# EAGLE board HWTestRig (EAGLE 7.4.0)
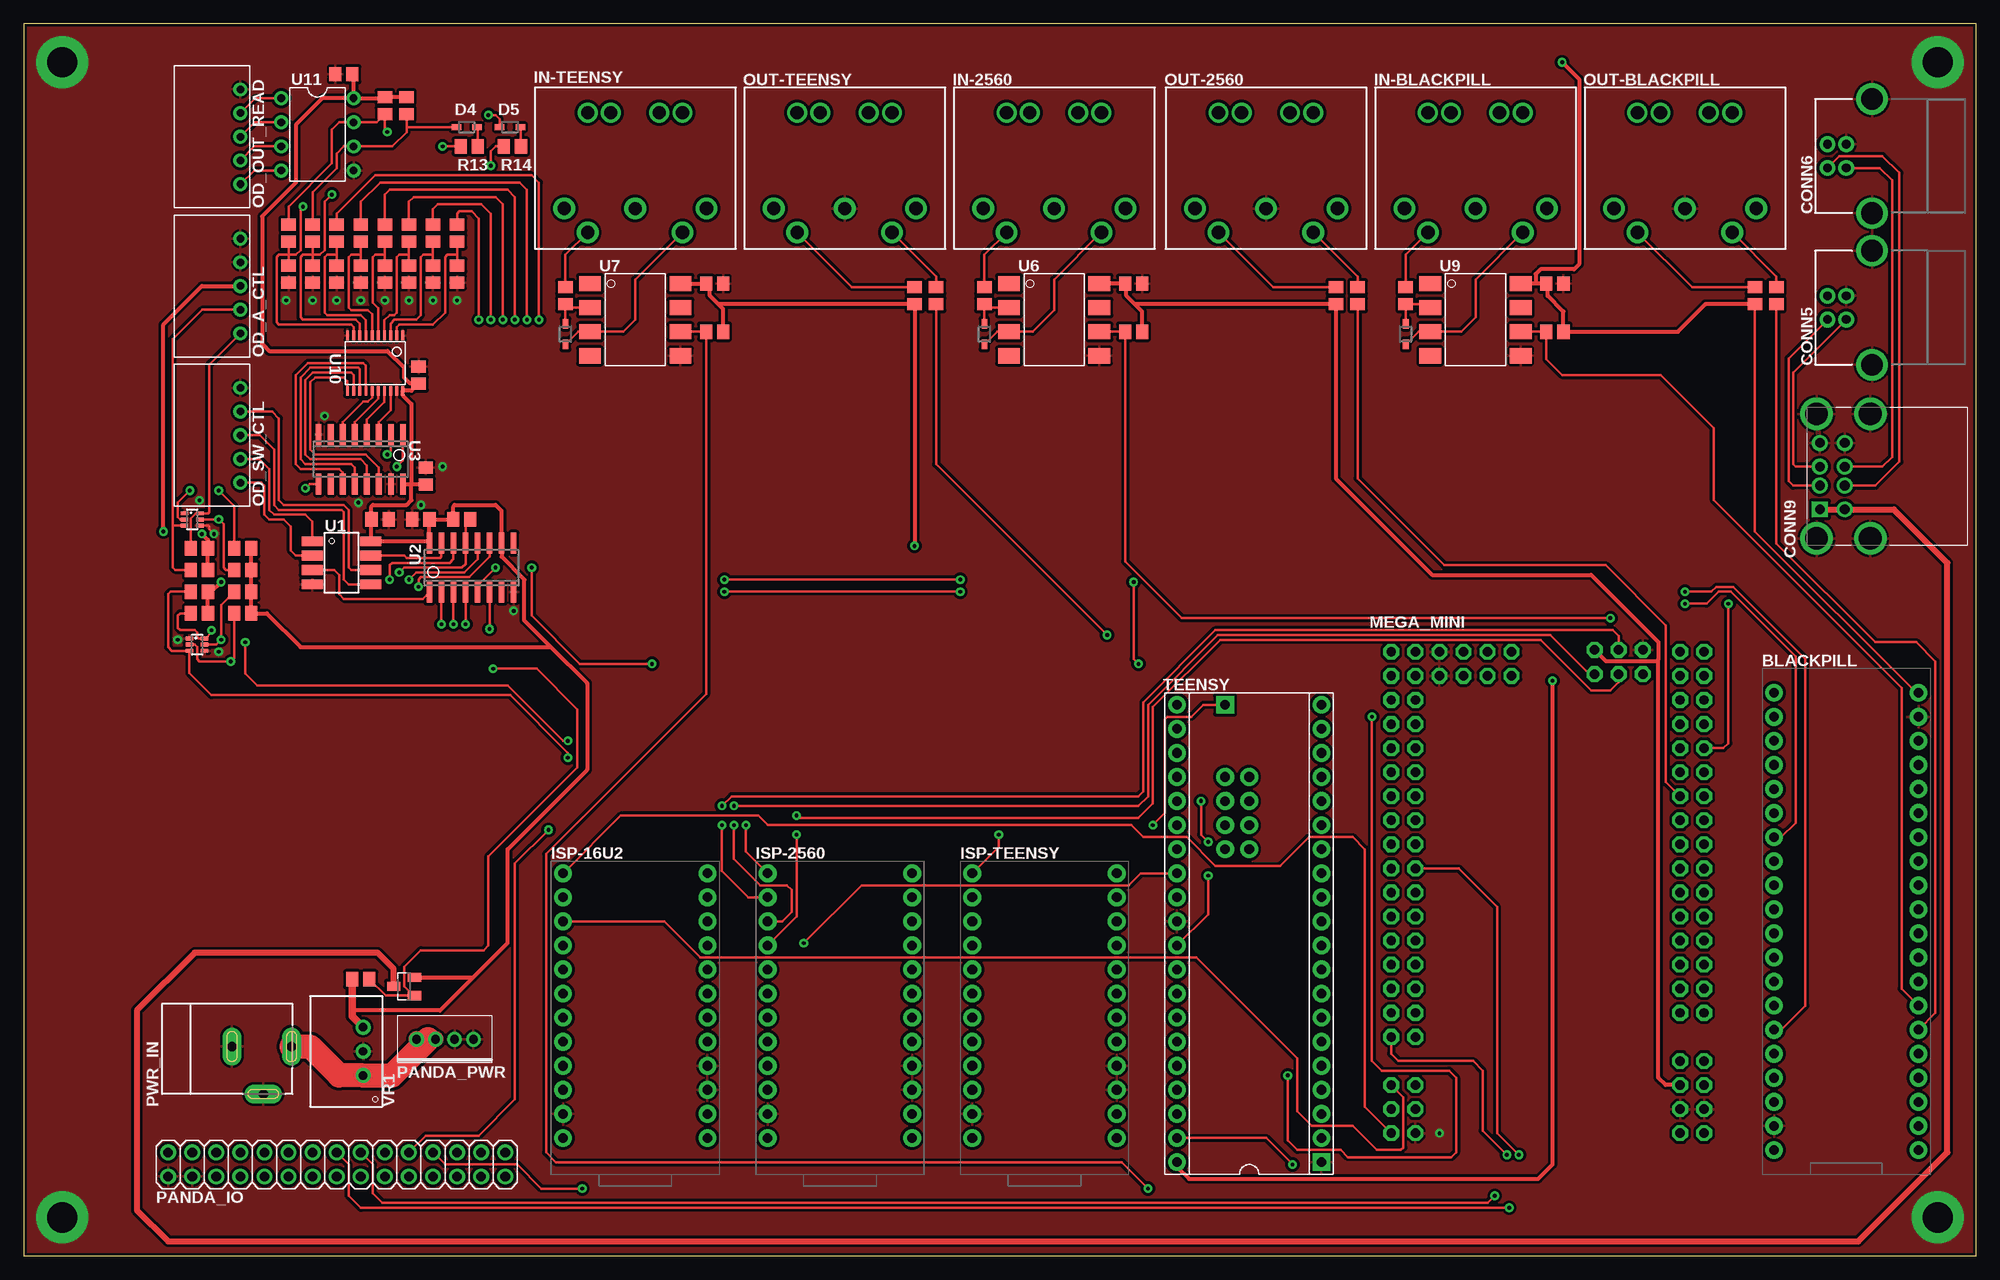
[diagram p0: board, top side]
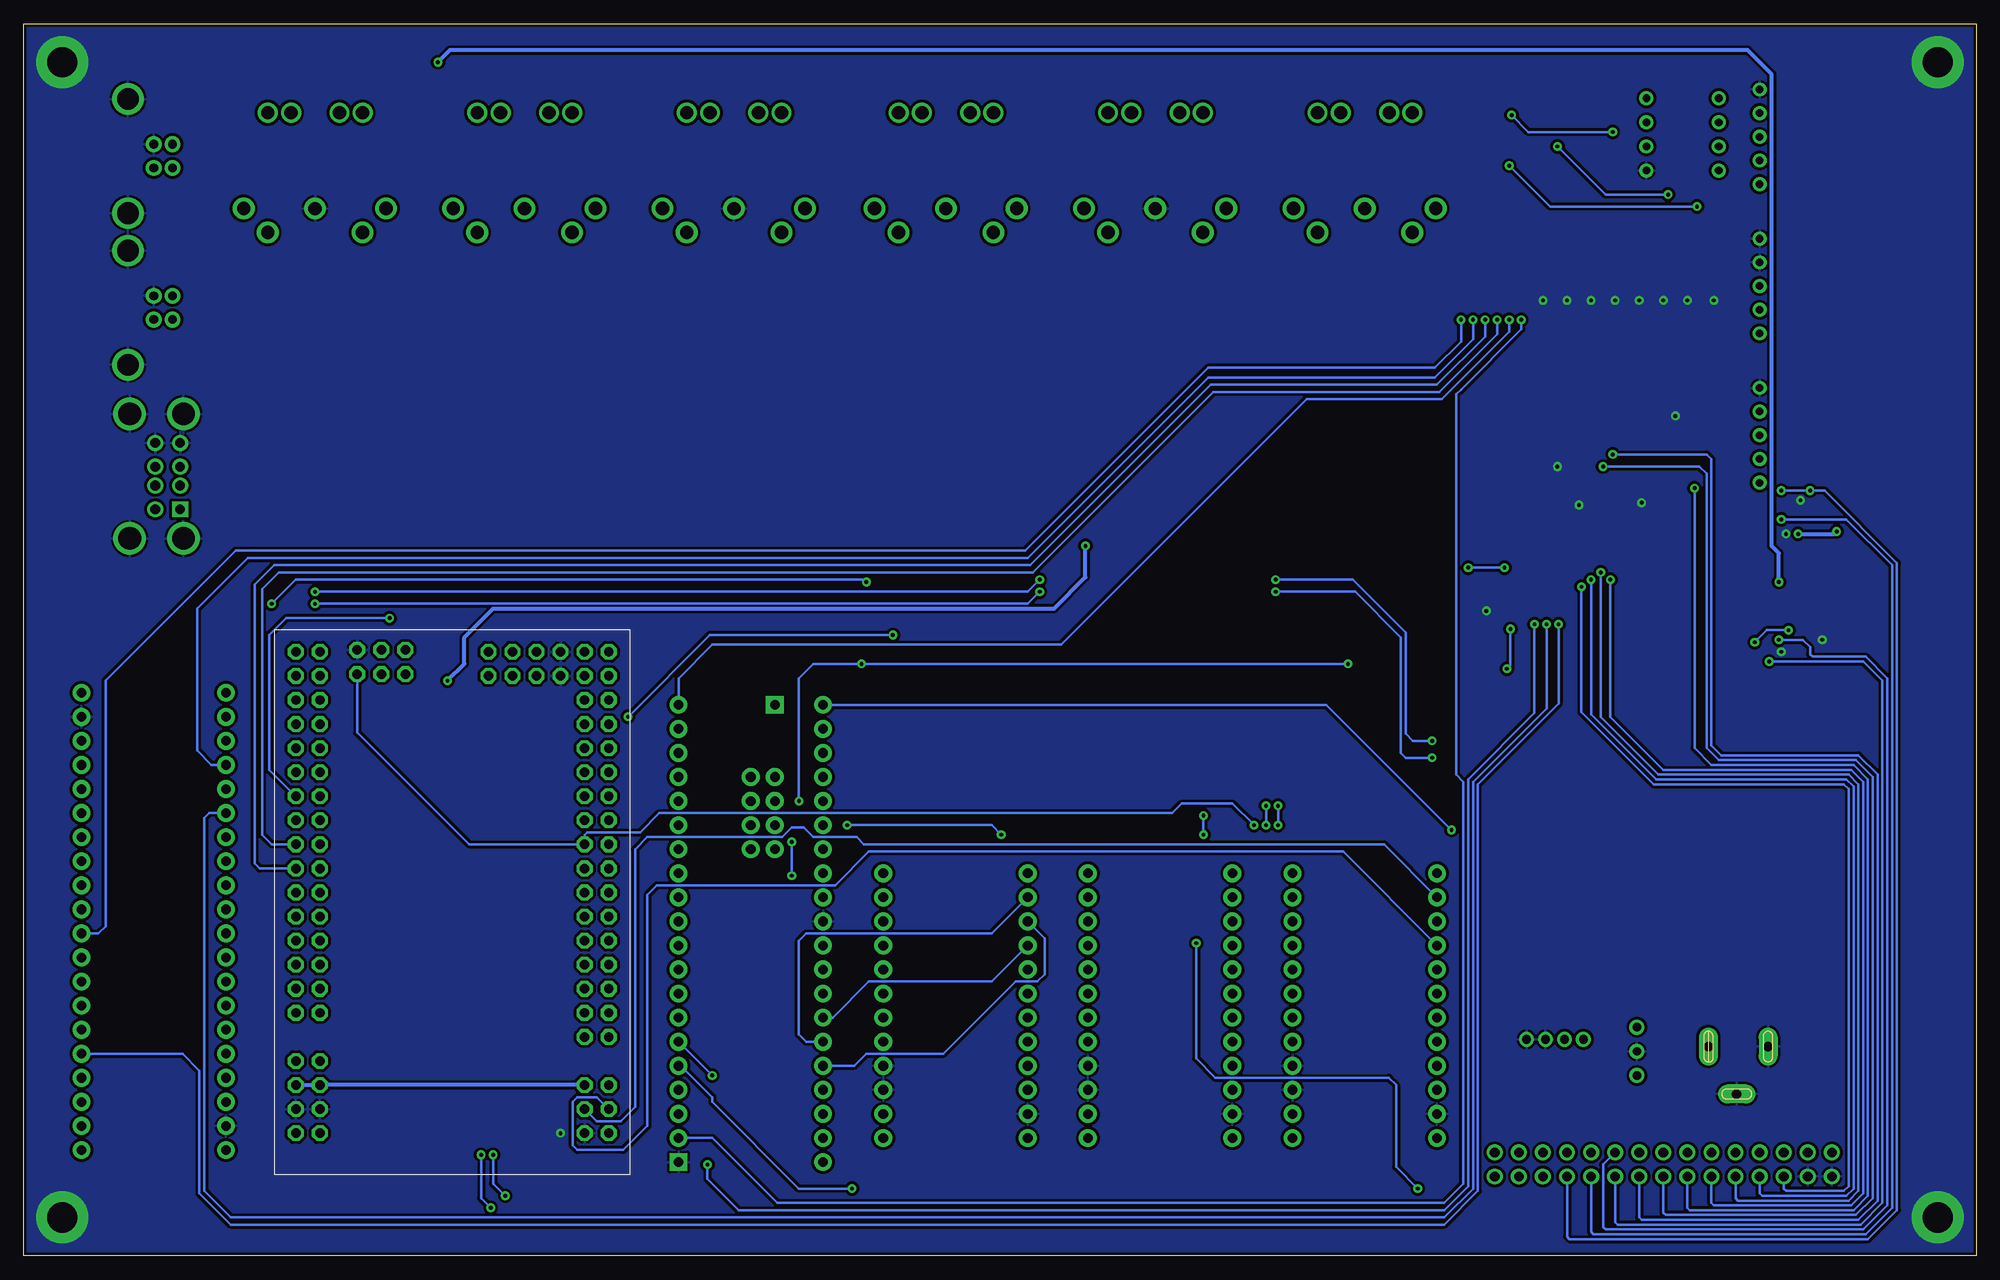
[diagram p1: board, bottom side, seen from below]

Size 205.99 x 130.05 mm. Coordinates in mm from the lower left corner, seen from the top.
Outline: 0,0 205.99,0 205.99,130.05 0,130.05 0,0
Copper layers (1*16): Top 0.035mm / dielectric 1.5mm / Bottom 0.035mm
Design rules "smiery *": minimum track width 8mil, minimum drill 12mil, track to track 7mil, track to pad 5mil, pad to pad 5mil, via to via 6mil, smd to smd 0mil, copper to edge 12mil, drill to drill 10mil, minimum pad ring 13mil, minimum via ring 10mil, stop-mask expansion 2mil, vias tented up to drill 25mil, thermal gap 10mil
Net classes: 1 vcc: width 0.254 mm

## Footprints (pad centres in the part's own frame; a part is rotated, then mirrored left to right if it is on the bottom)
STM32F411-BLACK_PILL = drill 1.016 pad 1.88: P1.1 -7.62,24.13; P1.2 -7.62,21.59; P1.3 -7.62,19.05; P1.4 -7.62,16.51; P1.5 -7.62,13.97; P1.6 -7.62,11.43; P1.7 -7.62,8.89; P1.8 -7.62,6.35; P1.9 -7.62,3.81; P1.10 -7.62,1.27; P1.11 -7.62,-1.27; P1.12 -7.62,-3.81; P1.13 -7.62,-6.35; P1.14 -7.62,-8.89; P1.15 -7.62,-11.43; P1.16 -7.62,-13.97; P1.17 -7.62,-16.51; P1.18 -7.62,-19.05; P1.19 -7.62,-21.59; P1.20 -7.62,-24.13; P2.1 7.62,24.13; P2.2 7.62,21.59; P2.3 7.62,19.05; P2.4 7.62,16.51; P2.5 7.62,13.97; P2.6 7.62,11.43; P2.7 7.62,8.89; P2.8 7.62,6.35; P2.9 7.62,3.81; P2.10 7.62,1.27; P2.11 7.62,-1.27; P2.12 7.62,-3.81; P2.13 7.62,-6.35; P2.14 7.62,-8.89; P2.15 7.62,-11.43; P2.16 7.62,-13.97; P2.17 7.62,-16.51; P2.18 7.62,-19.05; P2.19 7.62,-21.59; P2.20 7.62,-24.13
C0805 = smd 1.27 x 1.524: 1 -0.9,0; 2 0.9,0
USB-B-PTH = drill 0.914 pad 1.676: D+ 1.25,-4.572; D- 1.25,-6.553; GND -1.25,-4.572; VBUS -1.25,-6.553 | drill 2.286: S1 -6.02,-1.854; S2 6.02,-1.854
SS-52100-003 = drill 1.02: D+1 1,7.87; D+2 1,5.25; D-1 -1,7.87; D-2 -1,5.25; GND1 3.5,7.87; GND2 3.5,5.25; VBUS2 -3.5,5.25 | drill 2.4: S1 -6.57,8.22; S2 6.57,8.22; S3 -6.57,2.54; S4 6.57,2.54 | drill 1.02 square: VBUS1 -3.5,7.87
SOD-323 = smd 1 x 0.6: A 1.1,0; C -1.1,0
DIN5 = drill 1.4 pad 2.286: 1 -7.483,-4.768; 2 -0.003,-4.778; 3 7.527,-4.768; 4 -5.013,-7.298; 5 4.987,-7.288 | drill 1.4 pad 2: 6 4.987,5.341; 7 -5.02,5.341; 8 -2.582,5.341; 9 2.523,5.341
ARDUINO-PRO_MICRO = drill 1.016 pad 1.88: 1 -7.62,13.97; 2 -7.62,11.43; 3 -7.62,8.89; 4 -7.62,6.35; 5 -7.62,3.81; 6 -7.62,1.27; 7 -7.62,-1.27; 8 -7.62,-3.81; 9 -7.62,-6.35; 10 -7.62,-8.89; 11 -7.62,-11.43; 12 -7.62,-13.97; 13 7.62,-13.97; 14 7.62,-11.43; 15 7.62,-8.89; 16 7.62,-6.35; 17 7.62,-3.81; 18 7.62,-1.27; 19 7.62,1.27; 20 7.62,3.81; 21 7.62,6.35; 22 7.62,8.89; 23 7.62,11.43; 24 7.62,13.97
ARDUINO-MEGA2560-MEDUINO = drill 1 octagon: 2 -7.62,-13.97; 3 -7.62,-16.51; 4 -5.08,-13.97; 5 -5.08,-16.51; 6 -2.54,-13.97; 7 -2.54,-16.51; 8 0,-13.97; 9 0,-16.51; 10 2.54,-13.97; 11 2.54,-16.51; 12 5.08,-13.97; 13 5.08,-16.51; 14 7.62,-13.97; 15 7.62,-16.51; 16 10.16,-13.97; 17 10.16,-16.51; 18 12.7,-13.97; 19 12.7,-16.51; 20 15.24,-13.97; 21 15.24,-16.51; 22 17.78,-13.97; 23 17.78,-16.51; 24 20.32,-13.97; 25 20.32,-16.51; 26 22.86,-13.97; 27 22.86,-16.51; 28 25.4,-13.97; 29 25.4,-16.51; 30 27.94,-13.97; 31 27.94,-16.51; 32 10.16,16.51; 33 10.16,13.97; 34 12.7,16.51; 35 12.7,13.97; 36 15.24,16.51; 37 15.24,13.97; 38 17.78,16.51; 39 17.78,13.97; 40 20.32,16.51; 41 20.32,13.97; 42 22.86,16.51; 43 22.86,13.97; 44 25.4,16.51; 45 25.4,13.97; 46 27.94,16.51; 47 27.94,13.97; 48 27.94,8.89; 49 25.4,8.89; 50 27.94,6.35; 51 25.4,6.35; 52 27.94,3.81; 53 25.4,3.81; +3V3 -15.24,-13.97; +3V31 -15.24,-16.51; +5V -17.78,-13.97; +5V1 -17.78,-16.51; +5V2 -17.78,13.97; +5V3 28.14,-4.95; A0 -12.7,16.51; A1 -12.7,13.97; A2 -10.16,16.51; A3 -10.16,13.97; A4 -7.62,16.51; A5 -7.62,13.97; A6 -5.08,16.51; A7 -5.08,13.97; A8 -2.54,16.51; A9 -2.54,13.97; A10 0,16.51; A11 0,13.97; A12 2.54,16.51; A13 2.54,13.97; A14 5.08,16.51; A15 5.08,13.97; AREF 7.62,16.51; GND -20.32,-13.97; GND1 -20.32,-16.51; GND2 25.4,11.43; GND3 27.94,11.43; GND4 -22.86,13.97; GND5 28.14,-10.03; MISO_16U2 -17.78,16.51; MISO_2560 25.6,-4.95; MOSI_16U2 -20.32,13.97; MOSI_2560 28.14,-7.49; RESET 7.62,13.97; RESET@1 25.6,-10.03; RST_16U2 -22.86,16.51; RX0 -10.16,-13.97; SCK_16U2 -20.32,16.51; SCK_2560 25.6,-7.49; TX0 -10.16,-16.51; VIN -22.86,-13.97; VIN1 -22.86,-16.51
JST-XH-05P-H = drill 0.8: 1 -5,0; 2 -2.5,0; 3 0,0; 4 2.5,0; 5 5,0
2X15-2.54 = drill 1.016: 1 -17.78,-1.27; 2 -17.78,1.27; 3 -15.24,-1.27; 4 -15.24,1.27; 5 -12.7,-1.27; 6 -12.7,1.27; 7 -10.16,-1.27; 8 -10.16,1.27; 9 -7.62,-1.27; 10 -7.62,1.27; 11 -5.08,-1.27; 12 -5.08,1.27; 13 -2.54,-1.27; 14 -2.54,1.27; 15 0,-1.27; 16 0,1.27; 17 2.54,-1.27; 18 2.54,1.27; 19 5.08,-1.27; 20 5.08,1.27; 21 7.62,-1.27; 22 7.62,1.27; 23 10.16,-1.27; 24 10.16,1.27; 25 12.7,-1.27; 26 12.7,1.27; 27 15.24,-1.27; 28 15.24,1.27; 29 17.78,-1.27; 30 17.78,1.27
SMW200-04P = drill 0.9 pad 1.27: 1 -2.999,-0.001; 2 -0.999,-0.001; 3 1.001,-0.001; 4 3.001,-0.001
BARREL_JACK = drill 1 pad 2 long: GND@1 0,0.13; GND@2 5,3.43; PWR1 0,6.43
SOT23 = smd 1.4 x 1: 1 -1.1,0.95; 2 -1.1,-0.95; 3 1.1,0
SOT-363 = smd 0.4 x 0.8: 1 -0.65,-0.8; 2 0,-0.8; 3 0.65,-0.8; 4 0.65,0.8; 5 0,0.8; 6 -0.65,0.8
R0805 = smd 1.27 x 1.524: 1 -0.9,0; 2 0.9,0
TEENSY-2.0++ = drill 1.016 pad 1.88: AREF 3.81,7.62; GND1 1.27,7.62; PA0 8.89,2.54; PA1 11.43,2.54; PA2 13.97,2.54; PA3 16.51,2.54; PA4 8.89,0; PA5 11.43,0; PA6 13.97,0; PA7 16.51,0; PB0 -6.35,7.62; PB1 -8.89,7.62; PB2 -11.43,7.62; PB3 -13.97,7.62; PB4 -16.51,7.62; PB5 -19.05,7.62; PB6 -21.59,7.62; PB7 -21.59,-7.62; PC0 6.35,-7.62; PC1 8.89,-7.62; PC2 11.43,-7.62; PC3 13.97,-7.62; PC4 16.51,-7.62; PC5 19.05,-7.62; PC6 21.59,-7.62; PC7 24.13,-7.62; PD0 -19.05,-7.62; PD1 -16.51,-7.62; PD2 -13.97,-7.62; PD3 -11.43,-7.62; PD4 -8.89,-7.62; PD5 -6.35,-7.62; PD6 -3.81,-7.62; PD7 -1.27,-7.62; PE0 1.27,-7.62; PE1 3.81,-7.62; PE6 -1.27,7.62; PE7 -3.81,7.62; PF0 6.35,7.62; PF1 8.89,7.62; PF2 11.43,7.62; PF3 13.97,7.62; PF4 16.51,7.62; PF5 19.05,7.62; PF6 21.59,7.62; PF7 24.13,7.62; VCC -24.13,7.62 | drill 1.016 pad 1.88 square: GND -24.13,-7.62; RST 24.13,2.54
SM8 = smd 1.016 x 2.235: 1 -2.286,-3.099; 2 -0.762,-3.099; 3 0.762,-3.099; 4 2.286,-3.099; 5 2.286,3.099; 6 0.762,3.099; 7 -0.762,3.099; 8 -2.286,3.099
SO16 = smd 2.2 x 0.6: 1 -2.6,4.445; 2 -2.6,3.175; 3 -2.6,1.905; 4 -2.6,0.635; 5 -2.6,-0.635; 6 -2.6,-1.905; 7 -2.6,-3.175; 8 -2.6,-4.445; 9 2.6,-4.445; 10 2.6,-3.175; 11 2.6,-1.905; 12 2.6,-0.635; 13 2.6,0.635; 14 2.6,1.905; 15 2.6,3.175; 16 2.6,4.445
SMD-8 = smd 2.3 x 1.6: 1 -4.77,3.81; 2 -4.77,1.27; 3 -4.77,-1.27; 4 -4.77,-3.81; 5 4.77,-3.81; 6 4.77,-1.27; 7 4.77,1.27; 8 4.77,3.81
TSSOP20 = smd 0.991 x 0.305: 1 -2.918,2.925; 2 -2.918,2.275; 3 -2.918,1.625; 4 -2.918,0.975; 5 -2.918,0.325; 6 -2.918,-0.325; 7 -2.918,-0.975; 8 -2.918,-1.625; 9 -2.918,-2.275; 10 -2.918,-2.925; 11 2.918,-2.925; 12 2.918,-2.275; 13 2.918,-1.625; 14 2.918,-0.975; 15 2.918,-0.325; 16 2.918,0.325; 17 2.918,0.975; 18 2.918,1.625; 19 2.918,2.275; 20 2.918,2.925
DIL08 = drill 0.813 pad 1.397: 1 -3.81,3.81; 2 -3.81,1.27; 3 -3.81,-1.27; 4 -3.81,-3.81; 5 3.81,-3.81; 6 3.81,-1.27; 7 3.81,1.27; 8 3.81,3.81
TSR-1-2450 = drill 0.889: 1 -2.54,-1.778; 2 0,-1.778; 3 2.54,-1.778

## Placement (x,y rotation side)
BLACKPILL  STM32F411-BLACK_PILL  [STM32F411-BLACK_PILL]  192.28,35.31 180 top
C1  100n  [C0805]  72.9,102.62 180 top
C2  100n  [C0805]  161.54,102.62 180 top
C3  100n  [C0805]  37.59,77.72 0 top
C4  100n  [C0805]  41.91,77.72 180 top
C5  100n  [C0805]  42.42,82.3 90 top
C6  100n  [C0805]  41.66,92.96 90 top
C7  100n  [C0805]  30.48,103.63 90 top
C8  100n  [C0805]  27.94,103.63 90 top
C9  100n  [C0805]  40.64,103.63 90 top
C10  100n  [C0805]  38.1,103.63 90 top
C11  100n  [C0805]  45.72,103.63 90 top
C12  100n  [C0805]  43.18,103.63 90 top
C13  100n  [C0805]  35.56,103.63 90 top
C14  100n  [C0805]  33.02,103.63 90 top
C15  100n  [C0805]  117.09,102.62 180 top
C18  100n  [C0805]  33.78,124.71 180 top
CONN5  USB-B-H  [USB-B-PTH]  196.85,100.08 270 top
CONN6  USB-B-H  [USB-B-PTH]  196.85,116.08 270 top
CONN9  USB-DUAL  [SS-52100-003]  197.36,82.3 90 top
D1  [SOD-323]  101.35,97.28 270 top
D2  [SOD-323]  57.15,97.28 270 top
D3  [SOD-323]  145.8,97.28 270 top
D4  [SOD-323]  46.74,119.13 0 top
D5  [SOD-323]  51.31,119.13 0 top
IN-2560  MIDI_CONN-STD  [DIN5]  108.71,115.32 0 top
IN-BLACKPILL  MIDI_CONN-STD  [DIN5]  153.16,115.32 0 top
IN-TEENSY  MIDI_CONN-STD  [DIN5]  64.52,115.32 0 top
ISP-16U2  ARDUINO-PRO_MICRO  [ARDUINO-PRO_MICRO]  64.52,26.42 180 top
ISP-2560  ARDUINO-PRO_MICRO  [ARDUINO-PRO_MICRO]  86.11,26.42 180 top
ISP-TEENSY  ARDUINO-PRO_MICRO  [ARDUINO-PRO_MICRO]  107.7,26.42 180 top
MEGA_MINI  ARDUINO-MEGA2560-MEDUINO  [ARDUINO-MEGA2560-MEDUINO]  160.78,35.81 90 top
OD_A_CTL  PINHD-1X05-JST-XH-H  [JST-XH-05P-H]  22.86,102.36 90 top
OD_OUT_READ  PINHD-1X05-JST-XH-H  [JST-XH-05P-H]  22.86,118.11 90 top
OD_SW_CTL  PINHD-1X05-JST-XH-H  [JST-XH-05P-H]  22.86,86.61 90 top
OUT-2560  MIDI_CONN-STD  [DIN5]  131.06,115.32 0 top
OUT-BLACKPILL  MIDI_CONN-STD  [DIN5]  175.26,115.32 0 top
OUT-TEENSY  MIDI_CONN-STD  [DIN5]  86.61,115.32 0 top
PANDA_IO  PINHD-2X15  [2X15-2.54]  33.02,9.65 0 top
PANDA_PWR  PINHD-1X04-SMW-TH-2MM-V  [SMW200-04P]  44.45,22.86 0 top
PWR_IN  BARREL_JACK  [BARREL_JACK]  21.84,22.1 270 top
Q2  BSS314PEH6327XTSA1  [SOT23]  40.13,28.45 180 top
Q3  BSS138PS  [SOT-363]  18.29,64.52 270 top
Q4  BSS138PS  [SOT-363]  17.78,77.72 270 top
R1  10k  [R0805]  72.9,97.54 180 top
R2  220  [R0805]  93.98,101.35 270 top
R3  220  [R0805]  96.27,101.35 270 top
R4  10k  [R0805]  117.09,97.54 180 top
R5  220  [R0805]  101.35,101.35 270 top
R6  220  [R0805]  57.15,101.35 270 top
R7  10k  [R0805]  161.54,97.54 180 top
R8  33  [R0805]  182.63,101.35 270 top
R9  10  [R0805]  184.91,101.35 270 top
R10  220  [R0805]  138.43,101.35 270 top
R11  220  [R0805]  145.8,101.35 270 top
R12  220  [R0805]  140.72,101.35 270 top
R13  100  [R0805]  46.99,117.09 180 top
R14  100  [R0805]  51.56,117.09 180 top
R15  10k  [R0805]  35.56,29.21 180 top
R16  10k  [R0805]  46.23,77.72 180 top
R17  200k  [R0805]  30.48,107.95 270 top
R18  200k  [R0805]  27.94,107.95 270 top
R19  200k  [R0805]  40.64,107.95 270 top
R20  200k  [R0805]  38.1,107.95 270 top
R21  200k  [R0805]  45.72,107.95 270 top
R22  200k  [R0805]  43.18,107.95 270 top
R23  200k  [R0805]  35.56,107.95 270 top
R24  200k  [R0805]  33.02,107.95 270 top
R25  4.7k  [R0805]  18.54,74.68 0 top
R26  4.7k  [R0805]  23.11,74.68 0 top
R27  4.7k  [R0805]  23.11,72.39 0 top
R28  4.7k  [R0805]  18.54,72.39 0 top
R29  4.7k  [R0805]  18.54,67.82 0 top
R30  4.7k  [R0805]  23.11,67.82 0 top
R31  4.7k  [R0805]  23.11,70.1 0 top
R32  4.7k  [R0805]  18.54,70.1 0 top
R33  10k  [R0805]  38.1,121.41 90 top
R34  10k  [R0805]  40.39,121.41 270 top
TEENSY  TEENSY-2.0++  [TEENSY-2.0++]  129.29,34.04 90 top
U1  TC7W66FU  [SM8]  33.53,73.15 270 top
U2  74HC595-SO16  [SO16]  47.24,72.64 90 top
U3  74HC165  [SO16]  35.56,84.07 270 top
U6  6N137-SMD  [SMD-8]  108.71,98.81 0 top
U7  6N137-SMD  [SMD-8]  64.52,98.81 0 top
U9  6N137-SMD  [SMD-8]  153.16,98.81 0 top
U10  74AHC541  [TSSOP20]  37.08,94.23 270 top
U11  VO2631  [DIL08]  30.99,118.36 0 top
VR1  TSR-1-2450  [TSR-1-2450]  34.04,21.59 90 top

## Library data of the parts
BLACKPILL C1-C15 C18 CONN5 CONN6 CONN9 ISP-16U2 ISP-2560 ISP-TEENSY MEGA_MINI OD_A_CTL OD_OUT_READ OD_SW_CTL PANDA_IO PANDA_PWR R1-R34 TEENSY = igor_lbr
D1-D5 = igor_lbr; MANUFACTURER: Comchip Technology; MPN: 1N4148WS-HF
IN-2560 IN-BLACKPILL IN-TEENSY OUT-2560 OUT-BLACKPILL OUT-TEENSY = igor_lbr; MANUFACTURER: Switchcraft; MPN: 57PC5F
PWR_IN = igor_lbr; MANUFACTURER: Gravitech; MPN: CON-SOCJ-2155
Q2 = igor_lbr; MANUFACTURER: Infineon Technologies; MPN: BSS314PEH6327XTSA1
Q3 Q4 = igor_lbr; MANUFACTURER: Nexperia; MPN: BSS138PS
U1 = igor_lbr; MANUFACTURER: Toshiba; MPN: TC7W66FU,LF
U2 = igor_lbr; MANUFACTURER: Nexperia; MPN: 74HC595D
U3 = igor_lbr; MANUFACTURER: Nexperia; MPN: 74HC165D
U6 U7 U9 = igor_lbr; MANUFACTURER: Lite-On; MPN: 6N137S
U10 = igor_lbr; MANUFACTURER: Nexperia; MPN: 74AHC541PW,118
U11 = igor_lbr; MANUFACTURER: Vishay; MPN: VO2631
VR1 = igor_lbr; MANUFACTURER: Traco Power; MPN: TSR 1-2450

## Nets
+3V3_BP: BLACKPILL.P1.20 C2.2 R7.1 R8.2 R29.2 R32.2 U9.8
+3V3_OD2: OD_A_CTL.3 R25.2 R28.2
+5V [vcc]: C3.1 C4.1 C5.1 C6.1 C18.1 Q2.2 R15.2 R16.2 R26.2 R27.2 R30.2 R31.2 R33.2 R34.1 U1.8 U2.10 U2.16 U3.16 U10.20 U11.8 VR1.3
+5V_HUB: CONN9.VBUS1 CONN9.VBUS2 Q2.3
+5V_MEGA2560 [vcc]: C15.2 MEGA_MINI.+5V MEGA_MINI.+5V1 MEGA_MINI.+5V2 MEGA_MINI.+5V3 R4.1 R10.2 U6.8
+5V_TEENSY [vcc]: C1.2 R1.1 R2.2 TEENSY.VCC U7.8
+12V: PANDA_PWR.1 PANDA_PWR.2 PWR_IN.PWR1 VR1.1
ANALOG_CTL_BLACKPILL_1_3V: BLACKPILL.P2.6 Q3.6 R29.1
ANALOG_CTL_BLACKPILL_1_5V: PANDA_IO.19 Q3.2 R30.1
ANALOG_CTL_BLACKPILL_2_3V: BLACKPILL.P2.14 Q3.3 R32.1
ANALOG_CTL_BLACKPILL_2_5V: PANDA_IO.20 Q3.5 R31.1
ANALOG_CTL_MEGA2560_1: MEGA_MINI.A15 PANDA_IO.16
ANALOG_CTL_MEGA2560_2: MEGA_MINI.A0 PANDA_IO.18
ANALOG_CTL_OD2_1_3V: OD_A_CTL.1 Q4.6 R25.1
ANALOG_CTL_OD2_1_5V: PANDA_IO.23 Q4.2 R26.1
ANALOG_CTL_OD2_2_3V: OD_A_CTL.2 Q4.3 R28.1
ANALOG_CTL_OD2_2_5V: PANDA_IO.21 Q4.5 R27.1
ANALOG_CTL_TEENSY_1: PANDA_IO.24 TEENSY.PF0
ANALOG_CTL_TEENSY_2: PANDA_IO.22 TEENSY.PF7
GND: BLACKPILL.P1.19 BLACKPILL.P2.2 C1.1 C2.1 C3.2 C4.2 C5.2 C6.2 C7.1 C8.1 C9.1 C10.1 C11.1 C12.1 C13.1 C14.1 C15.1 C18.2 CONN5.GND CONN5.S1 CONN5.S2 CONN6.GND CONN6.S1 CONN6.S2 CONN9.GND1 CONN9.GND2 CONN9.S1 CONN9.S2 CONN9.S3 CONN9.S4 ISP-16U2.3 ISP-16U2.4 ISP-16U2.23 ISP-2560.3 ISP-2560.4 ISP-2560.23 ISP-TEENSY.3 ISP-TEENSY.4 ISP-TEENSY.23 MEGA_MINI.GND MEGA_MINI.GND1 MEGA_MINI.GND2 MEGA_MINI.GND3 MEGA_MINI.GND4 MEGA_MINI.GND5 OD_A_CTL.4 OD_A_CTL.5 OD_OUT_READ.5 OD_SW_CTL.5 OUT-2560.2 OUT-BLACKPILL.2 OUT-TEENSY.2 PANDA_IO.1 PANDA_IO.3 PANDA_PWR.3 PANDA_PWR.4 PWR_IN.GND@1 PWR_IN.GND@2 Q3.1 Q3.4 Q4.1 Q4.4 TEENSY.GND TEENSY.GND1 U1.4 U2.8 U3.8 U3.15 U6.5 U7.5 U9.5 U10.1 U10.10 U10.19 U11.5 VR1.2
MIDI_IN_1: D2.A IN-TEENSY.5 U7.3
MIDI_IN_2: IN-TEENSY.4 R6.1
MIDI_IN_3: D3.A IN-BLACKPILL.5 U9.3
MIDI_IN_4: IN-2560.4 R5.1
MIDI_IN_5: D1.A IN-2560.5 U6.3
MIDI_IN_6: IN-BLACKPILL.4 R11.1
MIDI_IN_2560: MEGA_MINI.19 R4.2 U6.6
MIDI_IN_BLACKPILL: BLACKPILL.P1.7 R7.2 U9.6
MIDI_IN_DIODE_OUT: D1.C R5.2 U6.2
MIDI_IN_DIODE_OUT1: D2.C R6.2 U7.2
MIDI_IN_DIODE_OUT2: D3.C R11.2 U9.2
MIDI_IN_TEENSY: R1.2 TEENSY.PD2 U7.6
MIDI_OUT_1: OUT-TEENSY.4 R2.1
MIDI_OUT_2: OUT-TEENSY.5 R3.1
MIDI_OUT_3: OUT-BLACKPILL.4 R8.1
MIDI_OUT_4: OUT-2560.4 R10.1
MIDI_OUT_5: OUT-2560.5 R12.1
MIDI_OUT_6: OUT-BLACKPILL.5 R9.1
MIDI_OUT_2560: MEGA_MINI.18 R12.2
MIDI_OUT_BLACKPILL: BLACKPILL.P1.6 R9.2
MIDI_OUT_TEENSY: R3.2 TEENSY.PD3
MISO_16U2: ISP-16U2.15 MEGA_MINI.MISO_16U2
MISO_2560: ISP-2560.15 MEGA_MINI.MISO_2560
MISO_TEENSY: ISP-TEENSY.15 TEENSY.PB3
MOSI_16U2: ISP-16U2.14 MEGA_MINI.MOSI_16U2
MOSI_2560: ISP-2560.14 MEGA_MINI.MOSI_2560
MOSI_TEENSY: ISP-TEENSY.14 TEENSY.PB2
N$1: D4.A R13.1
N$2: D5.A R14.1
OUT_READ_2560_1: MEGA_MINI.15 R19.1
OUT_READ_2560_1_BUF: C9.2 R19.2 U10.4
OUT_READ_2560_1_DEB: U3.5 U10.16
OUT_READ_2560_2: MEGA_MINI.13 R20.1
OUT_READ_2560_2_BUF: C10.2 R20.2 U10.5
OUT_READ_2560_2_DEB: U3.6 U10.15
OUT_READ_BLACKPILL_1: BLACKPILL.P1.10 R24.1
OUT_READ_BLACKPILL_1_BUF: C14.2 R24.2 U10.7
OUT_READ_BLACKPILL_1_DEB: U3.12 U10.13
OUT_READ_BLACKPILL_2: BLACKPILL.P2.17 R23.1
OUT_READ_BLACKPILL_2_BUF: C13.2 R23.2 U10.6
OUT_READ_BLACKPILL_2_DEB: U3.11 U10.14
OUT_READ_OD2_1: D5.C R18.1 R33.1 U11.7
OUT_READ_OD2_1_BUF: C8.2 R14.2 R18.2 U10.9
OUT_READ_OD2_1_C: OD_OUT_READ.3 U11.2
OUT_READ_OD2_1_DEB: U3.14 U10.11
OUT_READ_OD2_1_R: OD_OUT_READ.4 U11.1
OUT_READ_OD2_2: D4.C R17.1 R34.2 U11.6
OUT_READ_OD2_2_BUF: C7.2 R13.2 R17.2 U10.8
OUT_READ_OD2_2_C: OD_OUT_READ.2 U11.3
OUT_READ_OD2_2_DEB: U3.13 U10.12
OUT_READ_OD2_2_R: OD_OUT_READ.1 U11.4
OUT_READ_TEENSY_1: R21.1 TEENSY.PB7
OUT_READ_TEENSY_1_BUF: C11.2 R21.2 U10.2
OUT_READ_TEENSY_1_DEB: U3.3 U10.18
OUT_READ_TEENSY_2: R22.1 TEENSY.PC7
OUT_READ_TEENSY_2_BUF: C12.2 R22.2 U10.3
OUT_READ_TEENSY_2_DEB: U3.4 U10.17
PWR_CTL: Q2.1 R15.1 U2.6
RESET_16U2: ISP-16U2.13 MEGA_MINI.RST_16U2
RESET_2560: ISP-2560.13 MEGA_MINI.RESET MEGA_MINI.RESET@1
RESET_TEENSY: ISP-TEENSY.13 TEENSY.RST
SCK_16U2: ISP-16U2.16 MEGA_MINI.SCK_16U2
SCK_2560: ISP-2560.16 MEGA_MINI.SCK_2560
SCK_TEENSY: ISP-TEENSY.16 TEENSY.PB1
SR_DATA_OUT: PANDA_IO.11 U2.14
SR_IN_CLOCK: PANDA_IO.17 U3.2
SR_IN_DATA: PANDA_IO.13 U3.9
SR_IN_LATCH: PANDA_IO.15 U3.1
SR_OUT_CLOCK: PANDA_IO.5 U2.11
SR_OUT_ENABLE: PANDA_IO.9 R16.1 U2.13
SR_OUT_LATCH: PANDA_IO.7 U2.12
SW_CTL_AVR_1: TEENSY.PB6 U2.4
SW_CTL_AVR_2: MEGA_MINI.23 TEENSY.PE6 U2.5
SW_CTL_BLACKPILL_1: BLACKPILL.P2.15 U2.3
SW_CTL_BLACKPILL_2: BLACKPILL.P1.5 U2.2
SW_CTL_OD2_1: U1.7 U2.15
SW_CTL_OD2_2: U1.3 U2.1
SW_OD2_1_IN: OD_SW_CTL.2 U1.1
SW_OD2_1_OUT: OD_SW_CTL.1 U1.2
SW_OD2_2_IN: OD_SW_CTL.3 U1.5
SW_OD2_2_OUT: OD_SW_CTL.4 U1.6
USB_D+_HUB1: CONN5.D+ CONN9.D+1
USB_D+_HUB2: CONN6.D+ CONN9.D+2
USB_D-_HUB1: CONN5.D- CONN9.D-1
USB_D-_HUB2: CONN6.D- CONN9.D-2

## Tracks (layer width: path | path; a pad name or v marks a point on that pad's centre or on a via)
+3V3_BP  (via drill 0.4 pad 0.6)
  Top 0.254: R8.2 182.63,76.45 199.9,59.18 BLACKPILL.P1.20
  Top 0.406: 159.51,102.62 C2.2 160.78,102.48 160.78,101.35 162.44,99.68 R7.1 174.5,97.54 177.41,100.45 R8.2 | 159.51,102.62 U9.8 | R29.2 R32.2 19.81,70.1 v20.83,71.12 | v162.31,125.98 164.08,124.21 164.08,104.65 163.58,104.14 160.02,104.14 159.51,103.63 159.51,102.62
  Bottom 0.406: v20.83,71.12 20.83,74.17 21.59,74.93 21.59,124.71 24.13,127.25 161.04,127.25 v162.31,125.98
+3V3_OD2  (via drill 0.4 pad 0.6)
  Top 0.406: R28.2 R25.2 19.44,75.55 v18.8,76.2 | v14.73,76.45 14.73,98.3 18.8,102.36 OD_A_CTL.3
  Bottom 0.406: v18.8,76.2 14.99,76.2 v14.73,76.45
+5V
  Top 0.406: U3.16 40.89,81.47 | 40.89,81.47 42.34,81.47 C5.1 | 40.89,81.47 40.89,89.92 40.01,90.8 U10.20 40.91,91.32 C6.1 40.78,92.06 40.13,92.71 40.13,93.73 38.35,95.5 25.91,95.5 25.15,96.27 25.15,109.73 28.7,113.28 28.7,119.38 31.5,122.17 U11.8 | U11.8 34.8,124.6 C18.1 | R34.1 R33.2 37.96,122.17 U11.8 | R26.2 R27.2 R31.2 R30.2 25.65,67.82 29.21,64.26 55.63,64.26 | 40.89,81.47 40.89,79.76 40.39,79.25 36.83,79.25 36.69,79.11 C3.1 36.63,77.66 U1.8 42.6,75.44 U2.16 42.8,77.71 C4.1 R16.2 45.33,79.11 45.47,79.25 49.78,79.25 50.42,78.61 U2.10 50.42,73.79 52.83,71.37 52.83,67.06 55.63,64.26 | 47.37,29.34 51.05,33.02 51.05,42.93 59.44,51.31 59.44,60.45 55.63,64.26 | 47.37,29.34 43.94,25.91 34.66,25.91 | Q2.2 47.31,29.4 47.37,29.34
  Top 0.813: R15.2 34.66,25.91 34.66,25.28 VR1.3
+5V_HUB
  Top 0.61: Q2.3 39.03,30.31 37.34,32 18.03,32 11.94,25.91 11.94,4.83 15.24,1.52 193.55,1.52 202.95,10.92 202.95,73.15 197.3,78.8 CONN9.VBUS2 CONN9.VBUS1
+5V_MEGA2560
  Top 0.406: U6.8 C15.2 116.33,102.48 116.33,101.35 117.23,100.45 | 117.23,100.45 R10.2 138.43,82.04 148.59,71.88 165.35,71.88 172.47,64.77 172.47,62.99 | 172.47,62.99 172.21,62.74 166.95,62.74 MEGA_MINI.+5V3 | MEGA_MINI.+5V 173.23,18.03 172.47,18.8 172.47,62.99 | R4.1 117.99,99.68 117.23,100.45
  Bottom 0.406: MEGA_MINI.+5V1 MEGA_MINI.+5V MEGA_MINI.+5V2
+5V_TEENSY  (via drill 0.4 pad 0.6)
  Top 0.406: U7.8 C1.2 72.39,102.22 72.39,101.35 73.29,100.45 | 73.29,100.45 R2.2 v93.98,74.93 | TEENSY.VCC 121.67,9.4 122.94,8.13 159.77,8.13 161.29,9.65 v161.29,60.71 | R1.1 73.8,99.94 73.29,100.45
  Bottom 0.406: v161.29,60.71 159.51,62.48 159.51,65.28 156.46,68.33 97.28,68.33 93.98,71.63 v93.98,74.93
+12V
  Top 1.676: PANDA_PWR.2 42.67,22.86 PANDA_PWR.1
  Top 2.54: PWR_IN.PWR1 30.23,22.1 33.27,19.05 VR1.1 38.86,19.05 42.67,22.86
ANALOG_CTL_BLACKPILL_1_3V  (via drill 0.4, 0.4 pad 0.6)
  Top 0.254: BLACKPILL.P2.6 185.42,23.88 187.96,26.42 187.96,62.99 180.34,70.61 178.56,70.61 178.05,70.1 v175.26,70.1 | v98.81,71.37 v73.91,71.37 | R29.1 16.51,67.82 16.26,67.56 16.26,66.29 16.51,66.04 18.03,66.04 18.29,65.79 18.29,65.28 18.4,65.17 Q3.6 19.19,65.17 19.81,65.79 v19.81,66.04 | v23.37,64.77 23.37,61.47 24.64,60.2 51.05,60.2 56.9,54.36 v57.4,54.36
  Bottom 0.254: v175.26,70.1 100.08,70.1 v98.81,71.37 | v73.91,71.37 65.79,71.37 60.2,65.79 60.2,55.12 59.44,54.36 v57.4,54.36 | v19.81,66.04 22.1,66.04 v23.37,64.77
ANALOG_CTL_BLACKPILL_1_5V  (via drill 0.4)
  Top 0.254: Q3.2 18.03,64.52 18.29,64.26 18.29,62.99 18.54,62.74 v21.84,62.74 22.21,63.11 R30.1
  Bottom 0.254: v21.84,62.74 11.94,62.74 9.91,60.71 9.91,5.59 12.19,3.3 37.85,3.3 38.1,3.56 PANDA_IO.19
ANALOG_CTL_BLACKPILL_2_3V  (via drill 0.4, 0.4 pad 0.6)
  Top 0.254: BLACKPILL.P2.14 185.42,44.2 186.94,45.72 186.94,63.25 180.09,70.1 178.82,70.1 177.55,68.83 v175.26,68.83 | v98.81,70.1 v73.91,70.1 | R32.1 15.49,70.1 15.24,69.85 15.24,64.26 15.64,63.87 Q3.3 17.49,61.51 19.81,59.18 51.31,59.18 57.4,53.09 v57.4,52.58
  Bottom 0.254: v175.26,68.83 100.08,68.83 v98.81,70.1 | v73.91,70.1 65.53,70.1 60.71,65.28 60.71,53.09 60.2,52.58 v57.4,52.58
ANALOG_CTL_BLACKPILL_2_5V  (via drill 0.4)
  Top 0.254: Q3.5 20.32,64.52 v20.83,65.02 20.83,68.72 R31.1
  Bottom 0.254: v20.83,65.02 18.29,65.02 17.53,64.26 17.53,63.5 17.27,63.25 11.68,63.25 9.4,60.96 9.4,5.33 11.94,2.79 39.12,2.79 39.37,3.05 39.37,9.65 PANDA_IO.20
ANALOG_CTL_MEGA2560_1  (via drill 0.4)
  Top 0.254: MEGA_MINI.A15 151.38,40.89 155.45,36.83 155.45,12.95 v157.73,10.67 | v156.72,5.08 35.56,5.08 34.29,6.35 34.29,9.65 PANDA_IO.16
  Bottom 0.254: v157.73,10.67 157.73,6.1 v156.72,5.08
ANALOG_CTL_MEGA2560_2  (via drill 0.4)
  Top 0.254: MEGA_MINI.A0 144.27,21.34 145.03,20.57 152.91,20.57 153.92,19.56 153.92,13.21 v156.46,10.67 | v155.19,6.35 154.43,5.59 37.85,5.59 36.83,6.6 36.83,9.65 PANDA_IO.18
  Bottom 0.254: v156.46,10.67 156.46,7.62 v155.19,6.35
ANALOG_CTL_OD2_1_3V
  Top 0.254: OD_A_CTL.1 19.56,94.06 19.56,78.49 19.45,78.37 Q4.6 18.18,78.37 17.64,77.84 R25.1
ANALOG_CTL_OD2_1_5V  (via drill 0.4 pad 0.6)
  Top 0.254: v17.53,80.77 16.26,79.5 16.26,77.98 16.51,77.72 Q4.2 | v20.57,80.77 22.21,79.13 R26.1
  Bottom 0.254: v20.57,80.77 v17.53,80.77 16,80.77 8.38,73.15 8.38,4.83 11.43,1.78 42.93,1.78 43.18,2.03 PANDA_IO.23
ANALOG_CTL_OD2_2_3V
  Top 0.254: Q4.3 15.89,77.07 15.75,77.22 | 15.75,77.22 15.75,96.77 18.84,99.86 OD_A_CTL.2 | 15.75,77.22 15.75,72.64 16,72.39 R28.1
ANALOG_CTL_OD2_2_5V  (via drill 0.4)
  Top 0.254: R27.1 21.34,72.39 21.08,72.64 21.08,77.22 v20.57,77.72 Q4.5
  Bottom 0.254: v20.57,77.72 13.72,77.72 8.89,72.9 8.89,5.08 11.68,2.29 40.39,2.29 40.64,2.54 PANDA_IO.21
ANALOG_CTL_TEENSY_1  (via drill 0.4)
  Top 0.254: TEENSY.PF0 117.86,40.39 116.59,39.12 88.39,39.12 v82.3,33.02 | v58.93,7.11 54.61,7.11 52.07,9.65 44.45,9.65 PANDA_IO.24
  Bottom 0.254: v82.3,33.02 82.3,20.83 80.26,18.8 61.98,18.8 61.21,18.03 61.21,9.4 v58.93,7.11
ANALOG_CTL_TEENSY_2  (via drill 0.4)
  Top 0.254: v55.37,44.96 51.82,41.4 51.82,16.51 48.01,12.7 42.42,12.7 PANDA_IO.22
  Bottom 0.254: TEENSY.PF7 68.58,58.17 v55.37,44.96
GND  (via drill 0.4 pad 0.6, 3.2 pad 5.5)
  Top 0.254: Q4.4 19.45,77.07 19.56,76.96 19.56,76.71 v20.07,76.2
  other vias: 27.69,100.84 30.48,100.84 33.02,100.84 35.56,100.84 38.1,100.84 40.64,100.84 43.18,100.84 45.72,100.84 18.54,79.76 16.26,65.02 20.57,63.75 41.91,79.25 51.69,68.07 149.35,12.95 31.75,88.65 44.2,83.31 35.31,79.5 201.93,4.06 201.93,125.98 4.06,4.06 4.06,125.98
  pour Bottom (isolate 0.305): 0,130.05 0,0 205.99,0 205.99,130.05
  pour Top (isolate 0.305): 0,130.05 0,0 205.99,0 205.99,130.05
MIDI_IN_1
  Top 0.254: D2.A 58.5,97.54 U7.3 63.25,97.54 64.52,98.81 64.52,103.04 IN-TEENSY.5
MIDI_IN_2
  Top 0.254: R6.1 57.15,105.66 IN-TEENSY.4
MIDI_IN_3
  Top 0.254: D3.A 147.15,97.54 U9.3 151.64,97.54 153.16,99.06 153.16,103.04 IN-BLACKPILL.5
MIDI_IN_4
  Top 0.254: R5.1 101.35,105.66 IN-2560.4
MIDI_IN_5
  Top 0.254: D1.A 102.7,97.54 U6.3 106.43,97.54 108.71,99.82 108.71,103.04 IN-2560.5
MIDI_IN_6
  Top 0.254: R11.1 145.8,105.66 IN-BLACKPILL.4
MIDI_IN_2560  (via drill 0.4 pad 0.6)
  Top 0.254: U6.6 R4.2 116.19,73.29 122.17,67.31 v167.39,67.31
  Bottom 0.254: v167.39,67.31 178.31,67.31 180.09,65.53 180.09,51.31 MEGA_MINI.19
MIDI_IN_BLACKPILL
  Top 0.254: U9.6 R7.2 160.64,94.63 162.31,92.96 172.72,92.96 178.31,87.38 178.31,79.76 198.12,59.94 198.12,28.19 BLACKPILL.P1.7
MIDI_IN_DIODE_OUT
  Top 0.254: U6.2 101.72,100.08 R5.2 D1.C
MIDI_IN_DIODE_OUT1
  Top 0.254: D2.C R6.2 57.52,100.08 U7.2
MIDI_IN_DIODE_OUT2
  Top 0.254: D3.C R11.2 148.02,100.45 U9.2
MIDI_IN_TEENSY  (via drill 0.4 pad 0.6)
  Top 0.254: U7.6 R1.2 72,59.3 55.12,42.42 55.12,10.92 56.13,9.91 115.82,9.91 v118.62,7.11
  Bottom 0.254: v118.62,7.11 124.21,7.11 133.35,16.26 133.35,16.76 136.65,20.07 TEENSY.PD2
MIDI_OUT_1
  Top 0.254: R2.1 87.37,102.25 OUT-TEENSY.4
MIDI_OUT_2
  Top 0.254: R3.1 96.27,103.36 OUT-TEENSY.5
MIDI_OUT_3
  Top 0.254: R8.1 176.02,102.25 OUT-BLACKPILL.4
MIDI_OUT_4
  Top 0.254: R10.1 131.82,102.25 OUT-2560.4
MIDI_OUT_5
  Top 0.254: R12.1 140.72,103.36 OUT-2560.5
MIDI_OUT_6
  Top 0.254: R9.1 184.91,103.36 OUT-BLACKPILL.5
MIDI_OUT_2560
  Top 0.254: MEGA_MINI.18 173.23,50.04 173.23,66.55 166.88,72.9 149.86,72.9 140.72,82.04 R12.2
MIDI_OUT_BLACKPILL
  Top 0.254: BLACKPILL.P1.6 201.68,25.65 201.68,62.74 199.64,64.77 195.33,64.77 184.91,75.18 R9.2
MIDI_OUT_TEENSY  (via drill 0.4 pad 0.6)
  Top 0.254: v142.24,56.9 142.24,20.57 143.26,19.56 150.37,19.56 151.13,18.8 151.13,10.92 150.62,10.41 139.7,10.41 138.94,11.18 134.37,11.18 133.35,12.19 v133.35,19.05 | R3.2 96.27,83.57 v114.3,65.53
  Bottom 0.254: v114.3,65.53 133.6,65.53 v142.24,56.9 | v133.35,19.05 TEENSY.PD3
MISO_16U2
  Top 0.254: ISP-16U2.15 67.56,35.31 71.37,31.5 123.7,31.5 134.37,20.83 134.37,15.24 135.89,13.72 140.21,13.72 142.75,11.18 145.29,11.18 145.54,11.43 145.54,16.76 MEGA_MINI.MISO_16U2
MISO_2560  (via drill 0.4 pad 0.6)
  Top 0.254: MEGA_MINI.MISO_2560 165.15,61.41 161.04,65.53 125.98,65.53 118.62,58.17 118.62,48.51 117.6,47.5 v74.93,47.5 | v74.93,45.47 74.93,41.91 77.72,39.12 80.52,39.12 81.03,38.61 81.03,36.32 80.01,35.31 ISP-2560.15
  Bottom 0.254: v74.93,47.5 v74.93,45.47
MISO_TEENSY
  Bottom 0.254: TEENSY.PB3 118.36,20.07 117.09,21.34 108.97,21.34 101.35,28.96 99.06,28.96 98.3,29.72 98.3,33.53 ISP-TEENSY.15
MOSI_16U2
  Bottom 0.254: MEGA_MINI.MOSI_16U2 145.54,14.22 143,14.22 141.48,15.75 141.48,42.93 140.21,44.2 125.98,44.2 124.97,45.21 123.7,45.21 122.68,44.2 118.11,44.2 117.35,43.43 62.48,43.43 ISP-16U2.14
MOSI_2560  (via drill 0.4 pad 0.6)
  Top 0.254: MEGA_MINI.MOSI_2560 168.27,65.41 167.64,66.04 125.73,66.04 118.11,58.42 118.11,49.02 117.6,48.51 74.68,48.51 v73.66,47.5 | v73.66,45.47 73.66,40.64 76.45,37.85 ISP-2560.14
  Bottom 0.254: v73.66,47.5 v73.66,45.47
MOSI_TEENSY
  Bottom 0.254: TEENSY.PB2 123.44,22.61 124.21,23.37 124.21,33.27 123.44,34.04 103.89,34.04 ISP-TEENSY.14
N$1
  Top 0.254: R13.1 47.89,119.07 D4.A
N$2
  Top 0.254: R14.1 52.46,119.07 D5.A
OUT_READ_2560_1  (via drill 0.4 pad 0.6)
  Top 0.254: v50.55,98.81 50.55,111 49.78,111.76 41.15,111.76 40.64,111.25 R19.1
  Bottom 0.254: MEGA_MINI.15 179.83,43.43 180.85,44.45 180.85,70.36 179.07,72.14 99.57,72.14 80.52,91.19 56.64,91.19 50.55,97.28 v50.55,98.81
OUT_READ_2560_1_BUF
  Top 0.254: R19.2 40.64,105.66 | 40.64,105.66 C9.2 | U10.4 38.06,98.77 38.61,99.31 39.12,99.31 39.37,99.57 39.37,105.41 39.62,105.66 40.64,105.66
OUT_READ_2560_1_DEB
  Top 0.254: U10.16 37.41,90.49 34.92,88.01 U3.5
OUT_READ_2560_2  (via drill 0.4 pad 0.6)
  Top 0.254: v51.82,98.81 51.82,111.76 51.05,112.52 38.61,112.52 38.1,112.01 R20.1
  Bottom 0.254: MEGA_MINI.13 181.1,40.89 181.61,41.4 181.61,70.87 179.58,72.9 99.82,72.9 80.77,91.95 56.9,91.95 51.82,97.03 v51.82,98.81
OUT_READ_2560_2_BUF
  Top 0.254: R20.2 38.1,105.66 | 38.1,105.66 C10.2 | U10.5 37.41,100 36.83,100.58 36.83,105.41 37.08,105.66 38.1,105.66
OUT_READ_2560_2_DEB
  Top 0.254: U10.15 36.76,90.61 36.32,90.17 35.81,90.17 33.66,88.01 U3.6
OUT_READ_BLACKPILL_1  (via drill 0.4)
  Top 0.254: v54.36,98.81 54.36,113.28 53.59,114.05 37.08,114.05 33.02,109.98 R24.1
  Bottom 0.254: BLACKPILL.P1.10 198.12,34.04 197.36,34.8 197.36,60.71 183.64,74.42 100.33,74.42 81.03,93.73 57.15,93.73 54.36,96.52 v54.36,98.81
OUT_READ_BLACKPILL_1_BUF
  Top 0.254: R24.2 33.02,105.66 | 33.02,105.66 C14.2 | U10.7 36.11,98.77 35.56,99.31 32,99.31 31.75,99.57 31.75,105.41 32,105.66 33.02,105.66
OUT_READ_BLACKPILL_1_DEB
  Top 0.254: U10.13 35.46,93.57 35.31,93.73 30.23,93.73 29.21,92.71 29.21,84.07 29.72,83.57 34.54,83.57 34.92,83.18 U3.12
OUT_READ_BLACKPILL_2  (via drill 0.4 pad 0.6)
  Top 0.254: v53.09,98.81 53.09,112.52 52.32,113.28 37.59,113.28 35.56,111.25 R23.1
  Bottom 0.254: BLACKPILL.P2.17 186.18,51.82 187.71,53.34 187.71,68.33 182.37,73.66 100.08,73.66 81.03,92.71 57.15,92.71 53.09,96.77 v53.09,98.81
OUT_READ_BLACKPILL_2_BUF
  Top 0.254: U10.6 36.76,99.38 36.32,99.82 34.54,99.82 34.29,100.08 34.29,105.41 34.54,105.66 35.56,105.66 | 35.56,105.66 R23.2 | 35.56,105.66 C13.2
OUT_READ_BLACKPILL_2_DEB
  Top 0.254: U10.14 36.11,93.94 35.81,94.23 29.97,94.23 28.7,92.96 28.7,83.57 29.21,83.06 33.27,83.06 33.66,82.68 U3.11
OUT_READ_OD2_1  (via drill 0.4 pad 0.6)
  Top 0.254: R18.1 27.94,110.74 32.51,115.32 32.51,118.87 33.27,119.63 U11.7 37.22,119.63 R33.1 38.1,118.87 v38.35,118.62 | v49.02,120.4 49.78,120.4 50.21,119.97 D5.C
  Bottom 0.254: v38.35,118.62 47.24,118.62 v49.02,120.4
OUT_READ_OD2_1_BUF  (via drill 0.4 pad 0.6)
  Top 0.254: U10.9 34.81,98.03 34.54,98.3 26.92,98.3 26.67,98.55 26.67,105.41 26.92,105.66 27.94,105.66 | C8.2 27.94,105.66 | 27.94,105.66 28.7,105.66 29.21,106.17 29.21,110.49 v29.46,110.74 | v49.28,115.06 49.28,116.59 49.78,117.09 R14.2 | 27.94,105.66 R18.2
  Bottom 0.254: v29.46,110.74 44.96,110.74 v49.28,115.06
OUT_READ_OD2_1_C
  Top 0.254: U11.2 24.38,119.63 OD_OUT_READ.3
OUT_READ_OD2_1_DEB
  Top 0.254: U10.11 34.16,92.33 33.78,92.71 30.73,92.71 30.23,92.2 30.23,85.09 30.73,84.58 36.07,84.58 37.46,83.18 U3.14
OUT_READ_OD2_1_R
  Top 0.254: U11.1 24.42,122.17 OD_OUT_READ.4
OUT_READ_OD2_2
  Top 0.254: 40.39,119.13 40.39,118.62 38.86,117.09 U11.6 33.78,117.09 33.02,116.33 33.02,114.81 30.48,112.27 R17.1 | 40.39,119.13 R34.2 | D4.C 40.39,119.13
OUT_READ_OD2_2_BUF  (via drill 0.4 pad 0.6)
  Top 0.254: R17.2 30.48,105.66 | U10.8 35.46,98.4 35.05,98.81 29.46,98.81 29.21,99.06 29.21,105.41 29.46,105.66 30.48,105.66 | 30.48,105.66 31.24,105.66 31.75,106.17 31.75,111.25 v32.51,112.01 | v44.2,117.09 R13.2 | C7.2 30.48,105.66
  Bottom 0.254: v32.51,112.01 39.12,112.01 v44.2,117.09
OUT_READ_OD2_2_C
  Top 0.254: U11.3 24.34,117.09 OD_OUT_READ.2
OUT_READ_OD2_2_DEB
  Top 0.254: U10.12 34.81,92.95 34.54,93.22 30.48,93.22 29.72,92.46 29.72,84.58 30.23,84.07 35.56,84.07 36.19,83.44 U3.13
OUT_READ_OD2_2_R
  Top 0.254: U11.4 24.3,114.55 OD_OUT_READ.1
OUT_READ_TEENSY_1  (via drill 0.4 pad 0.6)
  Top 0.254: v48.01,98.81 48.01,109.47 47.24,110.24 45.97,110.24 45.72,109.98 R21.1
  Bottom 0.254: TEENSY.PB7 133.35,12.45 126.49,5.59 56.13,5.59 54.1,7.62 54.1,50.04 54.86,50.8 54.86,90.93 54.36,91.44 48.01,97.79 v48.01,98.81
OUT_READ_TEENSY_1_BUF
  Top 0.254: R21.2 45.72,105.66 | 45.72,105.66 C11.2 | U10.2 39.36,98.03 39.62,98.3 43.18,98.3 44.45,99.57 44.45,105.41 44.7,105.66 45.72,105.66
OUT_READ_TEENSY_1_DEB
  Top 0.254: U10.18 38.71,89.25 37.46,88.01 U3.3
OUT_READ_TEENSY_2  (via drill 0.4 pad 0.6)
  Top 0.254: v49.28,98.81 49.28,109.98 48.26,111 43.69,111 43.18,110.49 R22.1
  Bottom 0.254: TEENSY.PC7 136.91,60.96 133.35,64.52 96.52,64.52 70.61,90.42 56.39,90.42 49.28,97.54 v49.28,98.81
OUT_READ_TEENSY_2_BUF
  Top 0.254: R22.2 43.18,105.66 | 43.18,105.66 C12.2 | U10.3 38.71,98.4 39.12,98.81 41.4,98.81 41.91,99.31 41.91,105.41 42.16,105.66 43.18,105.66
OUT_READ_TEENSY_2_DEB
  Top 0.254: U10.17 38.06,90.13 36.19,88.27 U3.4
PWR_CTL  (via drill 0.4 pad 0.6)
  Top 0.254: v49.53,61.98 54.1,61.98 58.42,57.66 58.42,51.56 49.02,42.16 49.02,32.77 48.51,32.26 41.91,32.26 40.13,30.48 40.13,28.45 41.08,27.5 Q2.1 38.17,27.5 R15.1 | U2.6 v49.15,66.17
  Bottom 0.254: v49.15,66.17 49.15,62.36 v49.53,61.98
RESET_16U2
  Top 0.254: MEGA_MINI.RST_16U2 141.48,15.75 141.48,42.93 140.21,44.2 135.64,44.2 132.59,41.15 125.73,41.15 122.68,44.2 118.11,44.2 116.84,45.47 78.49,45.47 77.47,46.48 62.99,46.48 ISP-16U2.13
RESET_2560  (via drill 0.4 pad 0.6)
  Top 0.254: v76.2,45.47 76.2,42.67 ISP-2560.13
  Bottom 0.254: v76.2,45.47 78.49,47.75 83.82,47.75 84.84,46.74 138.94,46.74 140.97,44.7 146.56,44.7 146.81,44.45 MEGA_MINI.RESET 159,43.43 170.81,55.24 MEGA_MINI.RESET@1
RESET_TEENSY  (via drill 0.4 pad 0.6)
  Top 0.254: TEENSY.RST 124.46,58.17 123.19,56.9 120.65,56.9 120.4,56.64 120.4,46.74 v119.13,45.47 | v102.87,44.45 102.87,43.18 ISP-TEENSY.13
  Bottom 0.254: v119.13,45.47 103.89,45.47 v102.87,44.45
SCK_16U2
  Bottom 0.254: MEGA_MINI.SCK_16U2 145.54,16.76 147.57,16.76 148.08,16.26 148.08,11.68 147.57,11.18 142.75,11.18 140.21,13.72 140.21,38.1 139.19,39.12 120.4,39.12 116.84,42.67 66.8,42.67 ISP-16U2.16
SCK_2560  (via drill 0.4 pad 0.6)
  Top 0.254: MEGA_MINI.SCK_2560 168.27,60.58 167.39,59.69 165.35,59.69 160.02,65.02 126.24,65.02 119.13,57.91 119.13,47.75 117.6,46.23 81.79,46.23 v81.53,46.48 | v81.53,44.45 81.53,35.81 ISP-2560.16
  Bottom 0.254: v81.53,46.48 v81.53,44.45
SCK_TEENSY
  Bottom 0.254: TEENSY.PB1 120.65,25.15 116.84,28.96 103.89,28.96 ISP-TEENSY.16
SR_DATA_OUT  (via drill 0.4)
  Top 0.254: U2.14 45.34,73.53 44.96,73.15 38.86,73.15 38.61,72.9 v38.61,71.37
  Bottom 0.254: PANDA_IO.11 27.94,5.59 27.69,5.33 13.21,5.33 11.94,6.6 11.94,50.04 13.21,51.31 33.02,51.31 38.61,56.9 v38.61,71.37
SR_IN_CLOCK  (via drill 0.4)
  Top 0.254: U3.2 38.73,84.96 v38.35,84.58
  Bottom 0.254: v38.35,84.58 28.45,84.58 27.94,84.07 27.94,53.85 26.92,52.83 12.45,52.83 10.41,50.8 10.41,5.84 12.45,3.81 35.31,3.81 35.56,4.06 PANDA_IO.17
SR_IN_DATA  (via drill 0.4)
  Top 0.254: U3.9 30.17,81.47 v29.72,81.03
  Bottom 0.254: v29.72,81.03 29.72,53.59 27.94,51.82 12.95,51.82 11.43,50.29 11.43,6.35 12.95,4.83 30.23,4.83 30.48,5.08 PANDA_IO.13
SR_IN_LATCH  (via drill 0.4)
  Top 0.254: U3.1 40,83.95 v39.37,83.31
  Bottom 0.254: v39.37,83.31 29.21,83.31 28.45,82.55 28.45,53.59 27.18,52.32 12.7,52.32 10.92,50.55 10.92,6.1 12.7,4.32 32.77,4.32 33.02,4.57 PANDA_IO.15
SR_OUT_CLOCK  (via drill 0.4)
  Top 0.254: U2.11 49.15,73.79 46.99,71.63 41.91,71.63 41.66,71.37 v41.66,70.61
  Bottom 0.254: v41.66,70.61 41.66,57.4 34.04,49.78 13.97,49.78 13.46,49.28 13.46,7.37 13.97,6.86 20.07,6.86 20.32,7.11 PANDA_IO.5
SR_OUT_ENABLE  (via drill 0.4)
  Top 0.254: R16.1 46.61,77.2 U2.13 46.61,73.02 46.23,72.64 40.13,72.64 v39.62,72.14
  Bottom 0.254: PANDA_IO.9 25.4,6.1 25.15,5.84 13.46,5.84 12.45,6.86 12.45,49.78 13.46,50.8 33.53,50.8 39.62,56.9 v39.62,72.14
SR_OUT_LATCH  (via drill 0.4)
  Top 0.254: U2.12 47.88,73.53 46.48,72.14 41.4,72.14 v40.64,71.37
  Bottom 0.254: PANDA_IO.7 22.86,6.6 22.61,6.35 13.72,6.35 12.95,7.11 12.95,49.53 13.72,50.29 33.78,50.29 40.64,57.15 v40.64,71.37
SW_CTL_AVR_1  (via drill 0.4, 0.4 pad 0.6)
  Top 0.254: TEENSY.PB6 131.06,12.45 v133.86,9.65 | U2.4 v46.61,66.67
  Bottom 0.254: v133.86,9.65 133.86,8.13 130.56,4.83 56.13,4.83 53.59,7.37 53.59,50.29 46.61,57.28 v46.61,66.67
SW_CTL_AVR_2  (via drill 0.4, 0.4 pad 0.6)
  Top 0.254: MEGA_MINI.23 179.32,53.59 179.83,54.1 v179.83,68.83 | v117.09,71.12 117.09,62.99 v117.6,62.48 | v124.21,48.01 124.21,44.45 v124.97,43.69 | v124.97,40.13 124.97,36.07 TEENSY.PE6 | v66.29,62.48 58.67,62.48 53.59,67.56 v53.59,72.64 | v49.78,72.64 47.88,70.74 U2.5
  Bottom 0.254: v179.83,68.83 177.29,71.37 117.35,71.37 v117.09,71.12 | v124.21,48.01 124.21,60.96 122.68,62.48 v117.6,62.48 v66.29,62.48 | v124.97,43.69 v124.97,40.13 | v53.59,72.64 v49.78,72.64
SW_CTL_BLACKPILL_1  (via drill 0.4)
  Top 0.254: U2.3 v45.34,66.67
  Bottom 0.254: BLACKPILL.P2.15 186.44,46.74 186.94,46.23 186.94,6.86 184.15,4.06 56.13,4.06 53.09,7.11 53.09,50.04 45.34,57.79 v45.34,66.67
SW_CTL_BLACKPILL_2  (via drill 0.4)
  Top 0.254: U2.2 v44.07,66.67
  Bottom 0.254: BLACKPILL.P1.5 189.23,21.34 187.45,19.56 187.45,6.6 184.15,3.3 56.13,3.3 52.58,6.86 52.58,49.78 44.07,58.29 v44.07,66.67
SW_CTL_OD2_1
  Top 0.254: U1.7 40.13,73.91 40.39,73.66 43.94,73.66 44.07,73.79 U2.15
SW_CTL_OD2_2
  Top 0.254: U1.3 32.77,72.39 33.27,71.88 33.27,69.85 33.78,69.34 42.1,69.34 U2.1
SW_OD2_1_IN
  Top 0.254: U1.1 30.43,77.52 29.72,78.23 26.42,78.23 25.91,78.74 25.91,83.06 24.85,84.11 OD_SW_CTL.2
SW_OD2_1_OUT
  Top 0.254: U1.2 28.7,73.91 28.19,74.42 28.19,76.96 27.43,77.72 25.91,77.72 25.4,78.23 25.4,81.28 25.07,81.61 OD_SW_CTL.1
SW_OD2_2_IN
  Top 0.254: U1.5 34.29,70.87 33.78,71.37 33.78,78.49 33.53,78.74 26.92,78.74 26.42,79.25 26.42,85.09 24.89,86.61 OD_SW_CTL.3
SW_OD2_2_OUT
  Top 0.254: U1.6 34.54,72.39 34.29,72.64 34.29,78.74 33.78,79.25 27.43,79.25 26.92,79.76 26.92,88.39 26.2,89.11 OD_SW_CTL.4
USB_D+_HUB1
  Top 0.254: CONN9.D+1 186.96,83.3 186.69,83.57 186.69,93.24 CONN5.D+
USB_D+_HUB2
  Top 0.254: CONN9.D+2 196.07,83.3 197.1,84.33 197.1,113.54 195.83,114.81 192.3,114.81 CONN6.D+
USB_D-_HUB1
  Top 0.254: CONN9.D-1 186.67,81.3 186.18,81.79 186.18,94.71 CONN5.D-
USB_D-_HUB2
  Top 0.254: CONN9.D-2 195.34,81.3 197.87,83.82 197.87,114.3 196.09,116.08 191.55,116.08 CONN6.D-